# Altium PCB ESP32 with USBC PCB V1I1.PcbDoc (part 2 of 3)
Units mil, origin at the board's own origin, x right, y up, seen from the top; angles counter-clockwise.
Board outline 2713 x 1000 mil, 4 copper layers (L1, L2, L3, L4), stack 61.583 mil thick; 64 components, 73 nets, 299 pads, 159 vias.
Unrouted connection lines stored in the file: 1.
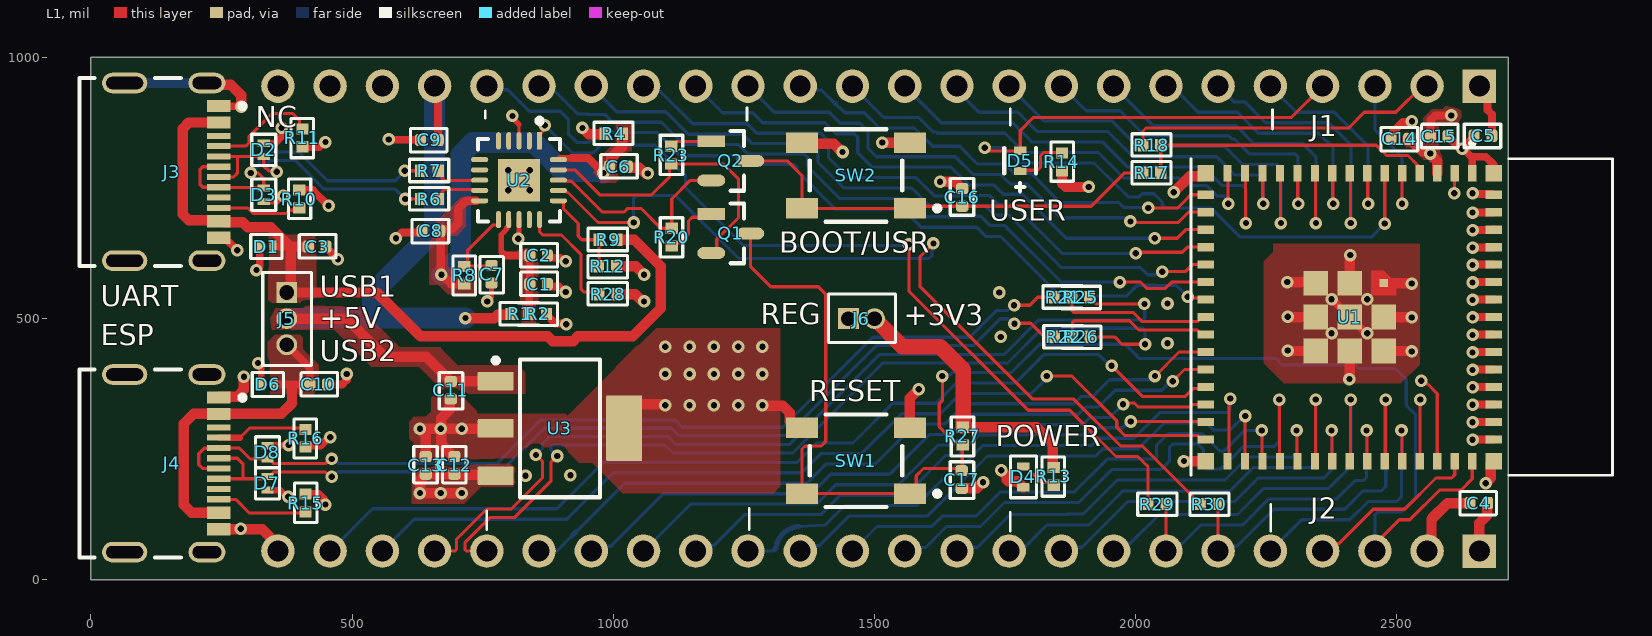
[diagram p0: L1 view]

## Via types
v1: diameter 24, hole 12, L1 to L4, tented both sides, 159 vias

## Nets (pads, with @x,y where several pads share a name; then routed paths per layer and width w, separated by ;. In a path a pad name is that pad's centre, name@x,y a point inside that pad or via, vN(x,y) a via of type N, cw(c..) or ccw(c..) an arc to the next point about the centre after c; other vN are vias at no path point) (continued)
+5V_VBUS2: (continued)
  L1 w20: J4.B4A9@244.84,128.51 204,128.51 193.49,128.51 178,144 178,299 196.49,317.49 J4.A4B9@244.84,317.49 364.49,317.49 385,338 385,369.32
+VCC_FTDI: C1.2 C2.2 R1.2 R2.2 U2.12 | length 238.3
  L1 w10.01: 788.66,624.16 785.5,627.32 785.5,660.8 790.7,666 796.22,671.52 796.22,674.15 796.22,674.61 799.9,678.29 U2.12@799.9,689.59
  L1 w15: 788.66,624.16 791.82,621 C2.2@840.07,621 C1.2@840.07,566 839.03,564.96 839.03,510.04 R2.2@837.99,509
BTN_GPIO0: C16.2 Q2.3 R17.1 SW2.1 SW2.2 | length 854.1
  L1 w6: Q2.3@1262.42,802 1333,802 1361.31,773.69 SW2.2@1361.31,711.02 SW2.1@1568,711.02 1572.06,715.07 C16.2@1668,715.07 1915.07,715.07 1979,779 R17.1@2013.99,779
CHIP_PU: C17.2 J2.3 Q1.3 R27.1 SW1.1 SW1.2 U1.45 | length 2817.6
  L1 w6: Q1.3@1262.42,663 1262.42,600.33 1301.75,561 1392.17,561 1406.82,546.36 1406.82,265.09 1398.03,256.31 1367.31,256.31 1361.31,250.31 SW1.2@1361.31,165.01 SW1.1@1568,165.01 1580,177.01 1580,199 1594,213 1662.93,213 C17.2@1667,208.93 1668,209.93 1668,256.99 R27.1@1669,257.99 1663.37,263.62 1653.73,263.62 1624,293.35 1624,336.78 1630,342.78 v1(1630,390) ; J2.3@2458,55 2458,68 2505,115 2525,115 2582,172 2623.04,172 2644.29,193.25 U1.45@2644.29,227.41
  L4 w6: v1(1630,390) 1632.68,392.68 1644.54,392.68 1648.86,397 1762.15,397 1816.15,451 1979.82,451 2006.82,424 2267.9,424 2280.09,411.8 2419.89,411.8 2427.14,404.55 2497.59,404.55 2518,384.14 2518,333.82 2535.94,315.88 2535.94,157.65 2508.28,130 2463.86,130 2458,124.14 J2.3@2458,55
CON1_USB_N: D2.2 J3.A7 J3.B7 R6.1 | length 560.1
  L1 w6.03: J3.A7@244.84,771.16 273.16,771.16 280.99,778.99 280.99,809.99 281.53,810.53 ; J3.B7@244.84,810.53 281.53,810.53 ; v1(356,781) 354.15,782.85 340.15,782.85 331,792 D2.2@331,810.2 301.83,810.2 301.51,810.53 281.53,810.53 ; v1(602,729) R6.1@630.99,729
  L4 w6.03: v1(356,781) 352.56,784.44 343.36,784.44 339.01,788.78 339.01,799.39 342.55,802.92 391.44,802.92 446.38,747.99 582.51,747.99 601.5,729 v1(602,729)
CON1_USB_P: D3.2 J3.A6 J3.B6 R7.1 | length 618.9
  L1 w6.03: J3.A6@244.84,790.84 214.06,790.84 209.19,785.97 209.19,756.34 214.06,751.47 J3.B6@244.84,751.47 245.61,750.71 330.09,750.71 D3.2@331,749.8 331,768 320,779 v1(306,779) ; v1(601,783) R7.1@630.99,783
  L4 w6.03: v1(306,779) 307.59,779 322.99,794.4 322.99,806.03 335.91,818.95 398.08,818.95 453.01,764.01 582.51,764.01 601,782.5 v1(601,783)
CON2_USB_N: D8.2 J4.A7 J4.B7 R21.1 | length 1868.2
  L1 w6.03: J4.A7@244.84,213.16 213.84,213.16 206.5,220.5 206.5,241.45 216.81,251.76 244.08,251.76 J4.B7@244.84,252.53 283.47,252.53 304.8,231.2 D8.2@338,231.2 342.92,231.2 346.8,227.33 346.8,226.05 350.33,222.52 448.48,222.52 457.47,231.5 v1(461,231.5) ; v1(1767.27,525.73) 1797.27,525.73 1812.54,541 R21.1@1843.98,541
  L4 w6.03: v1(461,231.5) 465.02,231.5 473.52,223 777.95,223 861.09,306.14 1118.28,306.14 1132.29,292.12 1324.88,292.12 1497.1,464.33 1682.67,464.33 1734.21,515.88 1754.75,515.88 1764.6,525.73 v1(1767.27,525.73)
CON2_USB_P: D7.2 J4.A6 J4.B6 R22.1 | length 1841.7
  L1 w6.03: J4.B6@244.84,193.47 291,193.47 ; J4.A6@244.84,232.84 280.49,232.84 291,222.33 291,193.47 ; v1(461,197.5) 457.47,197.5 448.48,206.48 350.33,206.48 346.8,202.95 346.8,201.67 342.92,197.8 D7.2@338,197.8 333.08,197.8 328.76,193.47 291,193.47 ; v1(1768,490) 1769.27,491.27 1799.05,491.27 1825.32,465 R22.1@1844.99,465
  L4 w6.03: v1(461,197.5) 464.05,197.5 473.52,206.97 784.59,206.97 867.73,290.1 1111.64,290.1 1125.65,276.09 1331.52,276.09 1503.74,448.3 1689.3,448.3 1740.85,499.85 1755.48,499.85 1765.33,490 v1(1768,490)
CON_ESP_USB_N: J2.21 R25.1 | length 1755.4
  L1 w6.03: J2.21@658,55 696.45,55 699.99,58.53 699.99,77.7 757.91,135.63 805,135.63 864.49,195.11 864.49,226.72 852.2,239 v1(852,239) ; R25.1@1912.01,541 1912.01,539.82 1919.62,532.2 1920.8,532.2 1924.95,528.06 v1(2016.94,528.06)
  L4 w6.03: v1(852,239) 852.2,239 864.49,251.28 864.49,260.92 877.64,274.07 1105,274.07 1120.18,258.9 1337,258.9 1509.15,431.05 1688.51,431.05 1748.04,431.04 1814.55,497.55 2013.94,497.55 2017.47,501.08 2017.47,527.53 v1(2016.94,528.06)
CON_ESP_USB_P: J2.20 R26.1 | length 1728.6
  L1 w6.03: J2.20@758,55 719.55,55 716.01,58.53 716.01,71.06 764.55,119.6 811.64,119.6 880.51,188.47 880.51,224.72 892.8,237 v1(893,237) ; R26.1@1913.01,465 1959.88,465 1973.88,451 v1(2018,451)
  L4 w6.03: v1(893,237) 892.8,237 880.51,249.28 880.51,254.28 884.28,258.05 1098.36,258.05 1113.54,242.86 1343.64,242.86 1515.79,415.02 1681.87,415.02 1754.68,415.01 1821.18,481.52 2013.94,481.52 2018,477.45 v1(2018,451)
CON_GPIO0: J1.2 R18.1 | length 606.7
  L1 w6: R18.1@2013.99,832 2013.99,859.14 2019.85,865 2408,865 2438,895 2498.22,895 2548.22,945 J1.2@2558,945
DTR_FTDI: Q2.2 R20.2 U2.18 | length 407.2
  L1 w6: U2.18@895,765 909.81,765 911.93,762.88 920.1,762.88 978.98,704 1020.82,704 1027.82,711 1053,711 1090.99,673.01 R20.2@1112,673.01 1112,729 1147.6,764.6 Q2.2@1187.58,764.6
ESP_USB_N: R21.2 R25.2 U1.23 | length 294.5
  L1 w6.03: R25.2@1877.99,541 1878,515.56 1881.53,512.03 1995.02,512.03 2012.77,494.28 2118.18,494.28 2121.72,497.82 2121.72,498.14 2126.57,503 U1.23@2134.45,503